# Altium PCB sht21_board.PcbDoc
Units mil, origin at the board's own origin, x right, y up, seen from the top; angles counter-clockwise.
Board outline 688 x 500 mil, 2 copper layers (Top, Bottom), stack 61.811 mil thick; 4 components, 8 nets, 17 pads, 0 vias.
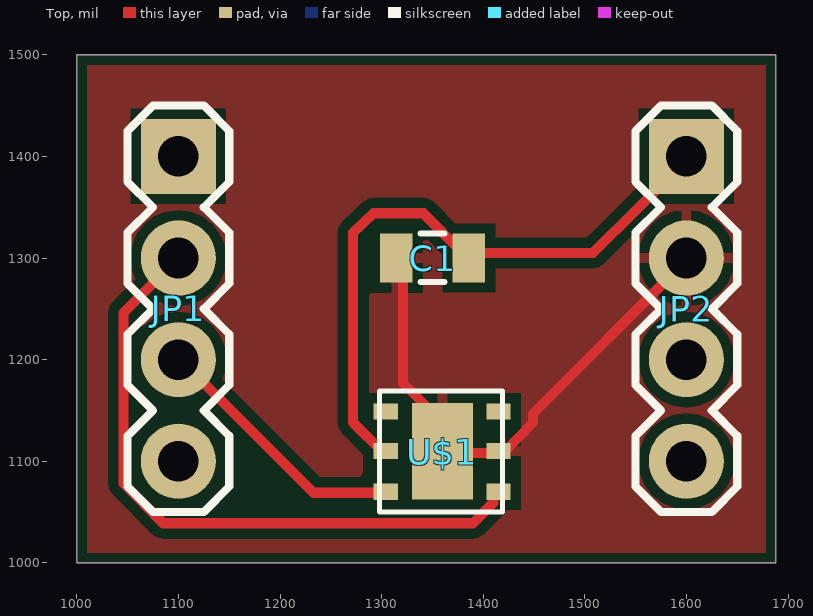
[diagram p0: Top view]
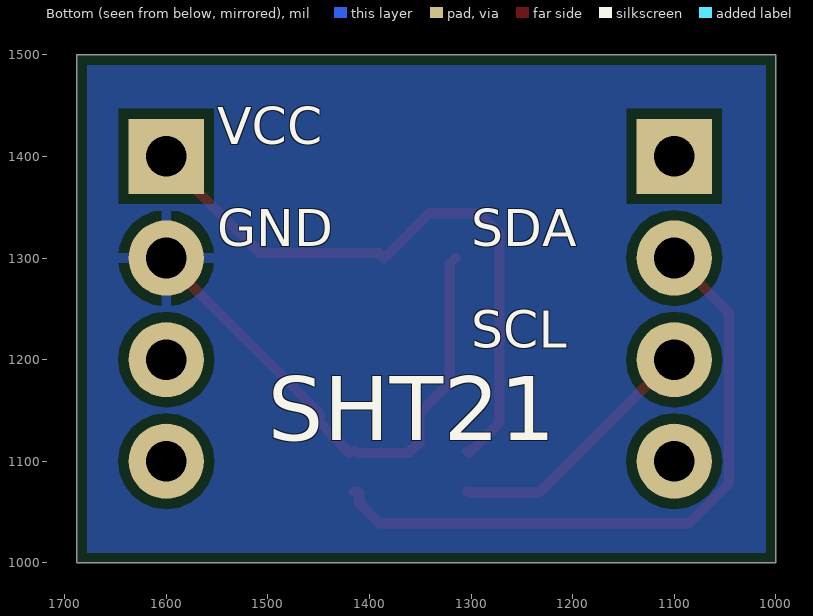
[diagram p1: Bottom view, seen from below]

## Layer stack, top to bottom
Top Solder: solder mask 0.4, Solder Resist, Dk 3.5
Top: signal copper 1.378
Dielectric 1: core 59.0551, FR-4, Dk 4.8
Bottom: signal copper 1.378
Bottom Solder: solder mask 0.4, Solder Resist, Dk 3.5

## Board outline
1000,1000 1688,1000 1688,1500 1000,1500

## Design rules (kind name [scope] priority, off if disabled: settings)
Clearance mdViaVia [IsVia vs IsVia] p1: gap=9.84
Clearance mdPadVia [IsPad vs IsVia] p2: gap=9.84
Clearance mdPadPad [IsPad vs IsPad] p3: gap=9.84
Clearance mdWireVia [(InLayerClass('Signal Layers') AND IsTrack) vs IsVia] p4: gap=9.84
Clearance mdWirePad [(InLayerClass('Signal Layers') AND IsTrack) vs IsPad] p5: gap=9.84
Clearance mdWireWire [(InLayerClass('Signal Layers') AND IsTrack) vs (InLayerClass('Signal Layers') AND IsTrack)] p6: gap=9.84
Clearance [All] p7: gap=9.84
HoleSize [All] p1: absolutevalues=TRUE maxlimit=100000 minlimit=11.81 maxpercent=80.000 minpercent=20.000
HoleToHoleClearance [All] p1: gap=8 allowstackedmicrovias=TRUE
PolygonConnect ThermalVias [IsVia] p1: connectstyle=Direct reliefconductorwidth=10 reliefentries=4 polygonreliefangle="90 Angle" airgapwidth=10
PolygonConnect [All] p2: connectstyle=Relief reliefconductorwidth=10 reliefentries=4 polygonreliefangle="90 Angle" airgapwidth=10
RoutingVias [All] p1: holewidth=28 width=50 viastyle="Through Hole" minholewidth=28 minwidth=50 maxholewidth=28 maxwidth=50
SilkToSilkClearance [All] p1 off: silktosilkclearance=10
SilkToSolderMaskClearance [IsPad] p1 off: minsilkscreentomaskgap=10 clearancetoexposedcopper=TRUE
SolderMaskExpansion [All] p1: expansion=4
UnpouredPolygon [All] p1: allowunpoured=FALSE
Width [All] p1: maxlimit=100000 minlimit=9.84 preferedwidth=10
25 further rules are at their usual default settings.

## Components (designator, comment, footprint, x,y, rotation, side; value= is the part's Value field where it differs from the comment)
C1 "10 uF" 0805 1350,1300 r0 top
JP1 "" 1X04 1100,1400 r270 top
JP2 "" 1X04 1600,1400 r270 top
U$1 "" SHT21_PADS 1300,1050 r0 top

## Footprints (in the part's own frame and the unit in brackets; to place one, negate y for a bottom-side part, rotate by r counter-clockwise, add the part's x,y. Pads: shape width x height; smd on the part's side, far side on the other; paste and mask are expansions set on the pad)
1X04 [mil] "1X04"
  rect 74x74 hole 40: 1(0,0)
  round 74 hole 40: 2(100,0) 3(200,0) 4(300,0)
  silkscreen extent -50,-50 350,50
0805 [mil] "0805"
  rect 32x48 smd: 1(-35.43,0) 2(36,0)
  silkscreen extent -12,-24 12,24
SHT21_PADS [mil] "SHT21_PADS"
  rect 24x16 smd: 1(115,20) 2(115,60) 3(115,99) 4(4,99) 5(4,60) 6(4,20)
  rect 60x95 smd: DIE_PAD(60,60)
  silkscreen extent -2,0 119,119

## Part data
C1: library part 0805
JP1 JP2: library part 1X04
U$1: library part SHT21_PADS

## Nets (pads, with @x,y where several pads share a name; then routed paths per layer and width w, separated by ;. In a path a pad name is that pad's centre, name@x,y a point inside that pad or via, vN(x,y) a via of type N, cw(c..) or ccw(c..) an arc to the next point about the centre after c; other vN are vias at no path point)
GND: C1.1 JP2.2 U$1.2 U$1.DIE_PAD | length 537.1
  Top w10: C1.1@1315,1300 1321,1295 1321,1177 1351,1147 1351,1118 U$1.DIE_PAD 1361,1108 1410,1108 U$1.2 1420,1108 1449,1138 1449,1147 1597,1295 JP2.2
JP1.1: JP1.1
JP1.4: JP1.4
JP2.3: JP2.3
JP2.4: JP2.4
SCL: JP1.3 U$1.6 | length 258.1
  Top w10: JP1.3 1105,1197 1233,1069 1302,1069 U$1.6
SDA: JP1.2 U$1.1 | length 647.9
  Top w10: JP1.2 1046,1246 1046,1078 1085,1039 1390,1039 1410,1059 1410,1069 U$1.1
VCC: C1.2 JP2.1 U$1.5 | length 629
  Top w10: U$1.5 1302,1108 1272,1138 1272,1325 1292,1344 1341,1344 1380,1305 C1.2 1390,1305 1508,1305 1597,1393 JP2.1
pads on no net: U$1.3 U$1.4

## Polygon pours and split planes (outlines as drawn)
GND on Top "Top-GND" (solid, remove dead copper, pour order 2): 992,1508 1708,1508 1708,992 992,992
GND on Bottom "Bottom-GND" (solid, remove dead copper, pour order 4): 992,1508 992,992 1708,992 1708,1508

## Keep-outs
Keep-Out Layer:
  the board outline again, w0

## Silkscreen, mask and mechanical layers (free items; w line width, h text height)
Bottom Overlay:
  text "VCC" at 1550,1400 h62
  text "SDA" at 1300,1300 h62
  text "GND" at 1550,1300 h62
  text "SCL" at 1300,1200 h62
  text "SHT21" at 1500,1100 h108.5
Dimension:
  the board outline again, w0

## Text inside footprints (layer, text, board x,y; h text height)
U$1: tNames "SHT21" at 1300,1200 h77.5